# Altium PCB DevBoard.PcbDoc (part 2 of 2)
Units mil, origin at the board's own origin, x right, y up, seen from the top; angles counter-clockwise.
Board outline 3635 x 2820 mil, 4 copper layers (Top Layer, Layer 1, Layer 2, Bottom Layer), stack 22.334 mil thick; 84 components, 151 nets, 484 pads, 93 vias.
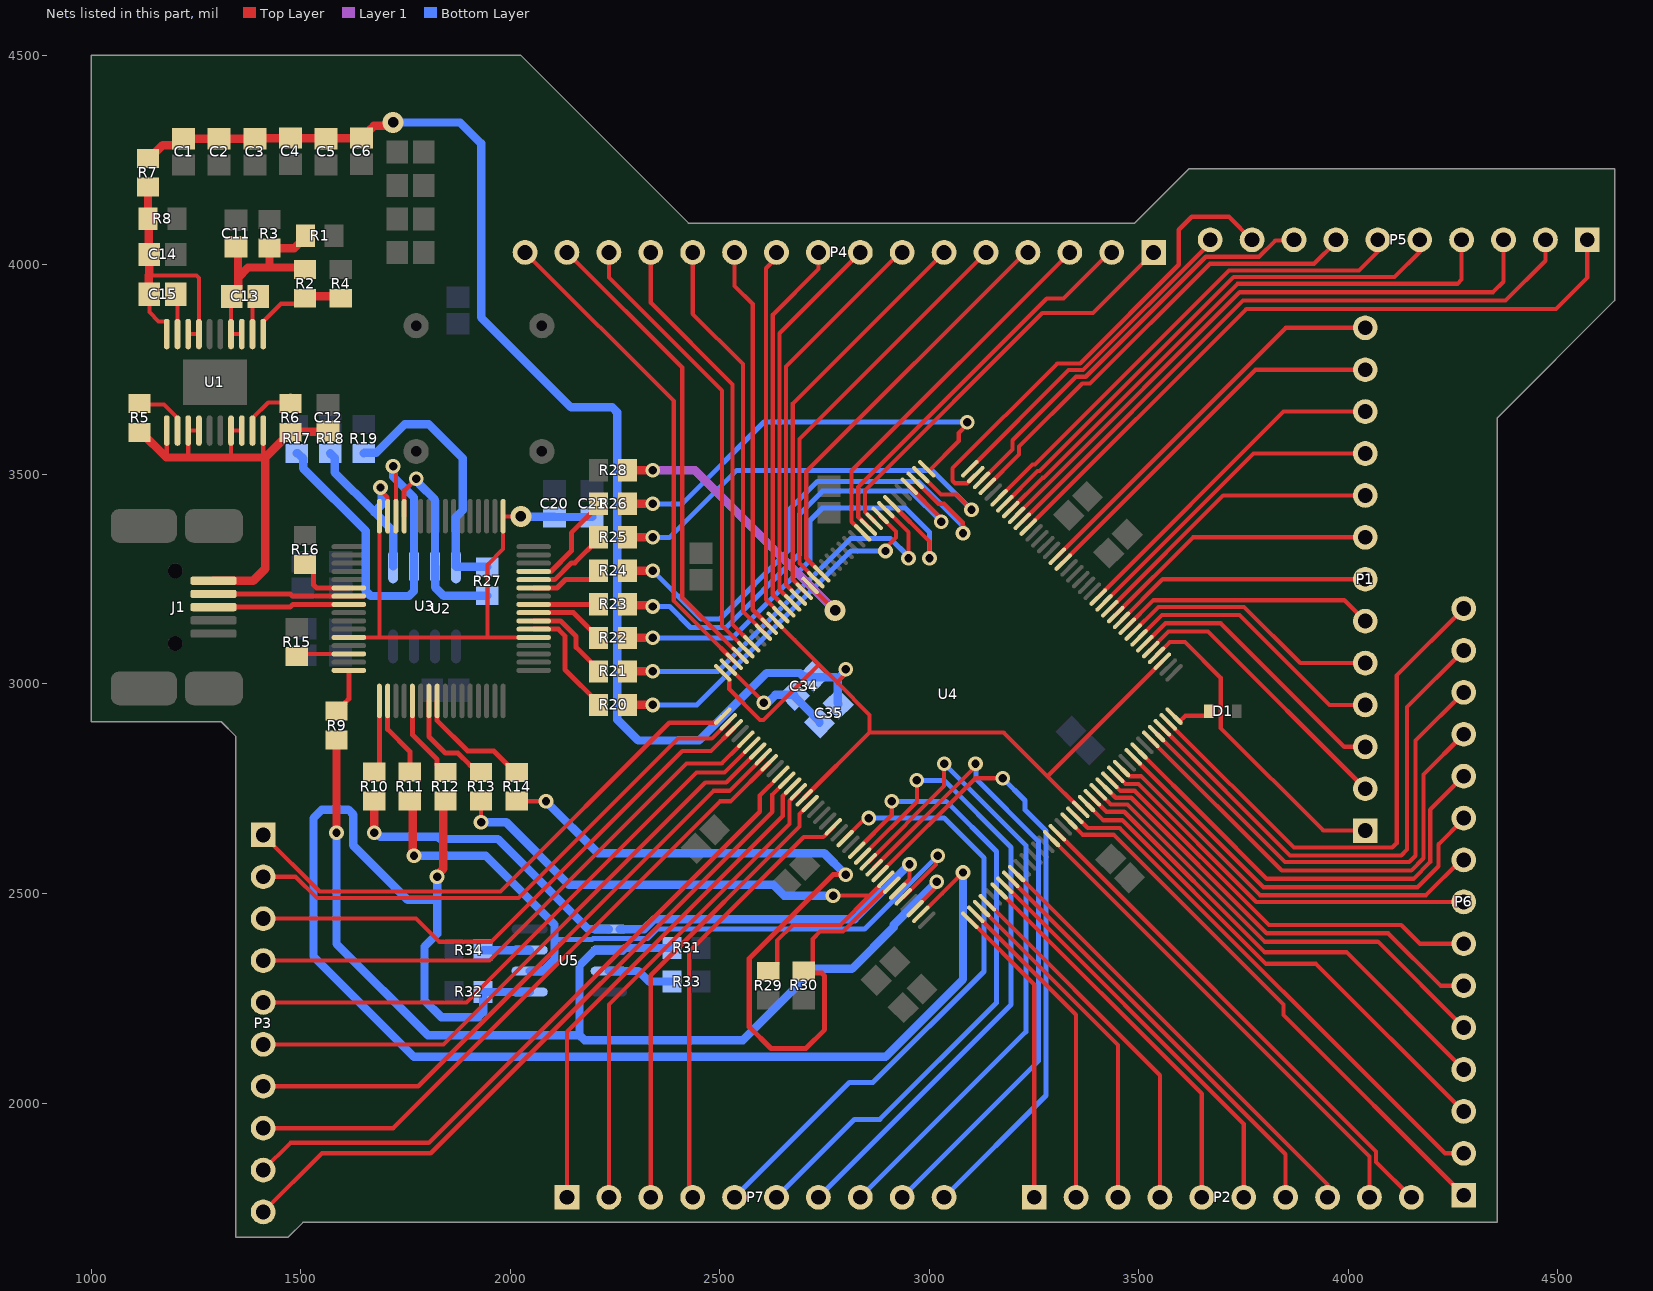
[diagram p4: the nets of this part, all layers, seen from the top]

## Via types
v1: diameter 35, hole 20, Top Layer to Bottom Layer, 71 vias
v2: diameter 50, hole 25, Top Layer to Bottom Layer, 11 vias
v3: diameter 19.68, hole 7.87, Top Layer to Bottom Layer, 6 vias
v4: diameter 50, hole 28, Top Layer to Bottom Layer, 4 vias
v5: diameter 35, hole 25, Top Layer to Bottom Layer, 1 vias

## Nets (pads, with @x,y where several pads share a name; then routed paths per layer and width w, separated by ;. In a path a pad name is that pad's centre, name@x,y a point inside that pad or via, vN(x,y) a via of type N, cw(c..) or ccw(c..) an arc to the next point about the centre after c; other vN are vias at no path point) (continued)
NetC1_2: C1.2 C2.2 C3.2 C4.2 C5.2 C6.1 C34.2 C35.2 R7.2 U4.27 U4.36 U4.51 U4.92 U4.111 | length 5060
  Top Layer w10: U4.36@2506.32,3026.5 2522.21,3010.61 2522.21,2987.79 2595.86,2914.14 2604.14,2914.14 2736.68,3046.68 ; U4.27@2631.59,3151.78 2679.18,3104.18 2736.68,3046.68 ; U4.51@2701.19,2728.63 2857.14,2884.58 ; v1(2800,3035) 2800,3024.18 2780.24,3004.41 2780.24,3003.13 ; U4.92@3360.97,2700.79 3280.88,2780.88 ; U4.111@3555.84,3054.34 3282.38,2780.88 3280.88,2780.88 ; 2736.68,3046.68 2780.24,3003.13 ; 2780.24,3003.13 2857.14,2926.23 2857.14,2884.58 ; 2857.14,2884.58 3177.18,2884.58 3280.88,2780.88
  Top Layer w20: R7.2@1135,4254.45 1138.94,4254.45 1170.39,4285.91 1204.41,4285.91 C1.2@1220,4301.5 C2.2@1305,4301.5 C3.2@1390,4301.5 1390.75,4302.24 1474.25,4302.24 C4.2@1475,4302.99 1475.75,4302.24 1559.25,4302.24 C5.2@1560,4301.5 1560.75,4302.24 1644.25,4302.24 C6.1@1645,4302.99 1646.97,4302.99 1662.56,4318.58 1662.56,4320.19 1674.27,4331.91 1703.79,4331.91 1711.88,4340 v2(1720,4340)
  Bottom Layer w20: v2(1720,4340) 1880,4340 1930,4290 1930,3875 2145,3660 2243.28,3660 2255,3648.28 2255,2915 2305,2865 2450,2865 2611.31,3026.31 2691.18,3026.31 2700.22,3017.27 C34.2@2722.27,3017.27 2723.66,3015.88 2776.82,3015.88 ; C35.2@2782.27,2952.27 2780.88,2953.66 2780.88,3011.82 2800,3030.94 v1(2800,3035)
NetC11_2: C11.2 C13.1 R1.1 R2.2 R3.2 U1.3 U1.4 | length 550.3
  Top Layer w10: C13.1@1333.39,3923.39 U1.4@1333.39,3835.16 U1.3@1358.98,3835.16
  Top Layer w20: C13.1@1333.39,3923.39 1350.59,3940.59 1350.59,3970.59 ; C11.2@1350,4057.01 1350,3971.18 1350.59,3970.59 ; R2.2@1490,3993.9 1425,3993.9 ; R1.1@1510.55,4070 1510.55,4066.06 1484.49,4040 R3.2@1425,4040 1425,3993.9 ; 1350.59,3970.59 1373.9,3993.9 1425,3993.9
NetC12_2: C12.2 J1.1 R5.2 R6.2 U1.11 U1.13 U1.14 U1.17 U1.18 U1.20 | length 1215.9
  Top Layer w10: 1178.94,3540.55 1179.84,3541.46 U1.11@1179.84,3604.84 ; 1230,3540.55 1231.02,3541.57 U1.13@1231.02,3604.84 U1.14@1256.61,3604.84 ; 1335,3540.55 1333.39,3542.17 U1.17@1333.39,3604.84 U1.18@1358.98,3604.84 ; U1.20@1410.16,3604.84 1410.16,3545.39 1415,3540.55
  Top Layer w20: R5.2@1115,3600.55 1118.94,3600.55 1178.94,3540.55 1230,3540.55 1335,3540.55 1415,3540.55 ; J1.1@1291.53,3246.38 1386.38,3246.38 1415,3275 1415,3540.55 ; C12.2@1565,3603.5 1563.52,3602.03 1476.48,3602.03 R6.2@1475,3600.55 1471.06,3600.55 1458.43,3587.91 1458.43,3583.98 1415,3540.55
NetC13_2: C13.2 U1.2 | length 95.4
  Top Layer w10: U1.2@1384.57,3835.16 1384.57,3911.57 C13.2@1397.99,3925
NetC14_2: C14.2 C15.1 R7.1 R8.2 U1.7 U1.8 U1.10 | length 668.2
  Top Layer w10: 1136.75,3975 1250.76,3975 1256.61,3969.14 U1.7@1256.61,3835.16 U1.8@1231.02,3835.16 ; C15.1@1138.5,3930 1138.5,3887.44 1160.54,3865.41 1178.1,3865.41 1179.84,3863.66 U1.10@1179.84,3835.16 U1.10@1180.57,3835.88
  Top Layer w20: C14.2@1136,4022.5 1136.75,4023.25 1136.75,4108.25 R8.2@1135,4110 R7.1@1135,4185.55 R7.1@1136.75,4187.3 ; C15.1@1138.5,3930 1136.75,3931.75 1136.75,3975 1138.5,3976.75 C14.2@1138.5,4025
NetC15_2: C15.2 U1.9 | length 85.4
  Top Layer w10: U1.9@1205.43,3835.16 C15.2@1205.43,3920.59
NetC20_2: C20.2 C21.2 U2.12 U2.37 U2.49 U2.64 | length 1249
  Top Layer w10: U2.12@1614.53,3111.1 1688.7,3111.1 ; U2.64@1687.36,3400.47 1687.36,3112.44 1688.7,3111.1 ; v2(2025,3400) 1983.11,3400 U2.49@1982.64,3400.47 1982.64,3322.01 1945,3284.37 1945,3111.1 ; U2.37@2055.47,3111.1 1963.9,3111.1 1960,3111.1 1945,3111.1 ; 1688.7,3111.1 1945,3111.1
  Bottom Layer w20: v2(2025,3400) 2025.75,3399.25 2104.25,3399.25 C20.2@2105,3398.5 C21.2@2195,3398.5
NetC34_1: C34.1 C35.1 U4.35 | length 291.5
  Top Layer w10: U4.35@2520.24,3040.42 2520.24,3040.31 2604.85,2955.7 v1(2604.85,2955.15)
  Bottom Layer w20: v1(2604.85,2955.15) 2613.27,2955.15 2632.24,2974.12 2676.34,2974.12 C34.1@2677.73,2972.73 2677.73,2970.23 2737.73,2910.23 C35.1@2737.73,2907.73
NetD1_1: D1.1 U4.108 | length 101
  Top Layer w10: U4.108@3583.68,2923.5 3597.07,2910.11 3597.18,2910.11 3611.32,2924.25 3659.72,2924.25 3666.54,2931.06 D1.1@3666.54,2935
NetD2_1: P2.1 U4.73 | length 724.9
  Top Layer w10: U4.73@3096.5,2436.32 3250,2282.82 P2.1@3250,1775
NetD2_2: 
NetD3_2: 
NetD4_2: 
NetD5_2: 
NetD6_2: 
NetD7_2: 
NetD8_2: 
NetD9_2: 
NetD10_2: 
NetD11_2: 
NetD12_2: 
NetD13_2: 
NetD14_2: 
NetD15_2: 
NetD16_2: 
NetD17_1: P2.2 U4.74 | length 774.5
  Top Layer w10: U4.74@3110.42,2450.24 3350,2210.66 P2.2@3350,1775
NetD32_1: P2.3 U4.75 | length 824
  Top Layer w10: U4.75@3124.34,2464.16 3450,2138.5 P2.3@3450,1775
NetD47_1: P2.4 U4.76 | length 873.6
  Top Layer w10: U4.76@3138.26,2478.08 3550,2066.34 P2.4@3550,1775
NetD62_1: P2.5 U4.78 | length 931.4
  Top Layer w10: U4.78@3166.1,2505.92 3650,2022.01 P2.5@3650,1775
NetD77_1: P2.6 U4.79 | length 980.9
  Top Layer w10: U4.79@3180.02,2519.83 3750,1949.85 P2.6@3750,1775
NetD92_1: P2.7 U4.80 | length 1030.5
  Top Layer w10: U4.80@3193.94,2533.75 3850,1877.69 P2.7@3850,1775
NetD107_1: P2.8 U4.81 | length 1080.1
  Top Layer w10: U4.81@3207.86,2547.67 3950,1805.53 P2.8@3950,1775
NetD122_1: P2.9 U4.87 | length 1170.4
  Top Layer w10: U4.87@3291.37,2631.19 4050,1872.56 P2.9@4050,1775
NetD137_1: P2.10 U4.88 | length 1220
  Top Layer w10: U4.88@3305.29,2645.11 4066,1884.4 4066,1859 P2.10@4150,1775
NetJ1_2: J1.2 U2.7 | length 360.2
  Top Layer w12: J1.2@1291.53,3214.88 1474.79,3214.88 1480.15,3209.53 U2.7@1649.53,3209.53
NetJ1_3: J1.3 U2.8 | length 360.7
  Top Layer w12: J1.3@1291.53,3183.39 1474.24,3183.39 1480.7,3189.84 U2.8@1649.53,3189.84
NetP1_1: P1.1 U4.112 | length 767.9
  Top Layer w10: U4.112@3541.92,3068.26 3573.66,3100 3610,3100 3695,3015 3695,2895 3940,2650 P1.1@4040,2650
NetP1_2: P1.2 U4.113 | length 685.1
  Top Layer w10: U4.113@3528,3082.18 3570.82,3125 3665,3125 P1.2@4040,2750
NetP1_3: P1.3 U4.114 | length 668.4
  Top Layer w10: U4.114@3514.08,3096.1 3562.99,3145 3695,3145 3990,2850 P1.3@4040,2850
NetP1_4: P1.4 U4.115 | length 651.7
  Top Layer w10: U4.115@3500.17,3110.02 3555.15,3165 3740,3165 3955,2950 P1.4@4040,2950
NetP1_5: P1.5 U4.116 | length 634.1
  Top Layer w10: U4.116@3486.25,3123.94 3546.31,3184 3751,3184 3885,3050 P1.5@4040,3050
NetP1_6: P1.6 U4.117 | length 614.1
  Top Layer w10: U4.117@3472.33,3137.86 3534.47,3200 3990,3200 P1.6@4040,3150
NetP1_7: P1.7 U4.118 | length 622.3
  Top Layer w10: U4.118@3458.41,3151.78 3556.63,3250 P1.7@4040,3250
NetP1_8: P1.8 U4.119 | length 671.9
  Top Layer w10: U4.119@3444.49,3165.7 3628.79,3350 P1.8@4040,3350
NetP1_9: P1.9 U4.120 | length 721.4
  Top Layer w10: U4.120@3430.57,3179.62 3700.95,3450 P1.9@4040,3450
NetP1_10: P1.10 U4.121 | length 771
  Top Layer w10: U4.121@3416.65,3193.53 3773.11,3550 P1.10@4040,3550
NetP1_11: P1.11 U4.122 | length 820.6
  Top Layer w10: U4.122@3402.73,3207.45 3845.27,3650 P1.11@4040,3650
NetP1_12: P1.12 U4.128 | length 910.9
  Top Layer w10: U4.128@3319.21,3290.97 3778.24,3750 P1.12@4040,3750
NetP1_13: P1.13 U4.129 | length 960.5
  Top Layer w10: U4.129@3305.29,3304.89 3850.4,3850 P1.13@4040,3850
NetP3_1: P3.1 U4.37 | length 1325.6
  Top Layer w10: P3.1@1410,2640 1545,2505 1976.35,2505 2378.96,2907.6 2490.42,2907.6 U4.37@2506.32,2923.5
NetP3_2: P3.2 U4.38 | length 1305.6
  Top Layer w10: P3.2@1410,2540 1487.37,2540 1538.37,2489 2019,2489 2400,2870 2480.66,2870 U4.38@2520.24,2909.58
NetP3_3: P3.3 U4.39 | length 1358.5
  Top Layer w10: P3.3@1410,2440 1775,2440 1830,2385 1955,2385 2410,2840 2478.5,2840 U4.39@2534.16,2895.66
NetP3_4: P3.4 U4.41 | length 1348.1
  Top Layer w10: P3.4@1410,2340 1950,2340 2420,2810 2504.18,2810 U4.41@2546.04,2851.87
NetP3_5: P3.5 U4.42 | length 1397.6
  Top Layer w10: P3.5@1410,2240 1895,2240 2444,2789 2510.9,2789 U4.42@2559.91,2838.01
NetP3_6: P3.6 U4.43 | length 1453.9
  Top Layer w10: P3.6@1410,2140 1840,2140 2465,2765 2515,2765 U4.43@2578.62,2828.62
NetP3_7: P3.7 U4.44 | length 1519.4
  Top Layer w10: P3.7@1410,2040 1780,2040 2485,2745 2522.69,2745 U4.44@2603.75,2826.06
NetP3_8: P3.8 U4.45 | length 1568.9
  Top Layer w10: P3.8@1410,1940 1720.47,1940 2500.47,2720 2525.53,2720 U4.45@2617.67,2812.14
NetP3_9: P3.9 U4.47 | length 1649.4
  Top Layer w10: P3.9@1410,1840 1475,1905 1805,1905 2595,2695 2595,2733.79 U4.47@2645.51,2784.3
NetP3_10: P3.10 U4.48 | length 1700.2
  Top Layer w10: P3.10@1410,1740 1550,1880 1810,1880 2625,2695 2625,2735.95 U4.48@2659.43,2770.38
NetP4_1: P4.1 U4.10 | length 1007
  Top Layer w10: U4.10@2868.22,3388.41 2868.22,3388.52 2846,3410.74 2846,3461.91 3269.09,3885 3390,3885 P4.1@3535,4030
NetP4_2: P4.2 U4.11 | length 942.5
  Top Layer w10: U4.11@2854.3,3374.49 2830,3398.79 2830,3470 3280,3920 3320,3920 3430,4030 P4.2@3435,4030
NetP4_3: P4.3 U4.12 | length 896.2
  Top Layer w10: U4.12@2840.38,3360.57 2840.38,3360.68 2814,3387.06 2814,3509 P4.3@3335,4030
NetP4_4: P4.4 U4.19 | length 1004.8
  Top Layer w10: U4.19@2742.95,3263.13 2706,3300.08 2706,3506.91 3229.09,4030 P4.4@3235,4030
NetP4_5: P4.5 U4.20 | length 981.3
  Top Layer w10: U4.20@2729.03,3249.21 2729.03,3249.32 2690,3288.35 2690,3585 P4.5@3135,4030
NetP4_6: P4.6 U4.22 | length 969.4
  Top Layer w10: U4.22@2701.19,3221.37 2701.19,3221.49 2674,3248.68 2674,3669 P4.6@3035,4030
NetP4_7: P4.7 U4.23 | length 929.7
  Top Layer w10: U4.23@2671.37,3223.46 2658,3236.84 2658,3758 2930,4030 P4.7@2935,4030
NetP4_8: P4.8 U4.24 | length 929.4
  Top Layer w10: U4.24@2673.35,3193.53 2642,3224.89 2642,3837 P4.8@2835,4030
NetP4_9: P4.9 U4.25 | length 909.4
  Top Layer w10: U4.25@2659.43,3179.62 2626,3213.05 2626,3881 2735,3990 P4.9@2735,4030
NetP4_10: P4.10 U4.26 | length 889.4
  Top Layer w10: P4.10@2635,4030 2635,4017.03 2610,3992.03 2610,3201.21 U4.26@2645.51,3165.7
NetP4_11: P4.11 U4.28 | length 926.4
  Top Layer w10: P4.11@2535,4030 2535,3950 2578.39,3906.61 2578.39,3177.14 U4.28@2617.67,3137.86
NetP4_12: P4.12 U4.29 | length 976
  Top Layer w10: P4.12@2435,4030 2435,3883.36 2555,3763.36 2555,3172.69 U4.29@2603.75,3123.94
NetP4_13: P4.13 U4.31 | length 1033.7
  Top Layer w10: P4.13@2335,4030 2335,3910 2530,3715 2530,3142.01 U4.31@2575.92,3096.1
NetP4_14: P4.14 U4.32 | length 1083.3
  Top Layer w10: P4.14@2235,4030 2235,3970 2505,3700 2505,3139.18 U4.32@2562,3082.18
NetP4_15: P4.15 U4.33 | length 1133
  Top Layer w10: P4.15@2135,4030 2410,3755 2410,3206.03 2479.38,3136.65 2479.69,3136.65 U4.33@2548.08,3068.26
NetP4_16: P4.16 U4.34 | length 1182.4
  Top Layer w10: P4.16@2035,4030 2390,3675 2390,3198.5 2467.85,3120.65 U4.34@2534.16,3054.34
NetP5_1: P5.1 U4.134 | length 1666
  Top Layer w10: U4.134@3235.7,3374.49 3756.21,3895 4495,3895 4570,3970 P5.1@4570,4055
NetP5_2: P5.2 U4.135 | length 1550.7
  Top Layer w10: U4.135@3221.78,3388.41 3748.37,3915 4375,3915 4470,4010 P5.2@4470,4055
NetP5_3: P5.3 U4.136 | length 1488.1
  Top Layer w10: U4.136@3207.86,3402.33 3281.53,3476 3740.53,3935 4345,3935 4370,3960 P5.3@4370,4055
NetP5_4: P5.4 U4.137 | length 1373.4
  Top Layer w10: U4.137@3193.94,3416.25 3269.69,3492 3272,3492 3735,3955 4260,3955 4270,3965 P5.4@4270,4035
NetP5_5: P5.5 U4.138 | length 1242.9
  Top Layer w10: U4.138@3180.02,3430.17 3257.85,3508 3263,3508 3726,3971 4110,3971 4170,4031 P5.5@4170,4035
NetP5_6: P5.6 U4.139 | length 1150.4
  Top Layer w10: U4.139@3166.1,3444.08 3246.01,3524 3252.19,3524 3715.19,3987 4025,3987 4070,4032 P5.6@4070,4035
NetP5_7: P5.7 U4.141 | length 1084.2
  Top Layer w10: U4.141@3138.26,3471.92 3214,3547.66 3214,3566.42 3364.76,3717.18 3383.52,3717.18 3669.34,4003 3918,4003 P5.7@3970,4055
NetP5_8: P5.8 U4.142 | length 996.4
  Top Layer w10: U4.142@3124.34,3485.84 3198,3559.5 3198,3581.54 3349.64,3733.18 3373.05,3733.18 3659.34,4019.47 3786.79,4019.47 3825.47,4058.16 3868.16,4058.16 P5.8@3870,4060
NetP5_9: P5.9 U4.143 | length 1131.8
  Top Layer w10: U4.143@3110.42,3499.76 3110.31,3499.76 3089.69,3479.14 3060.86,3479.14 3055,3485 3055,3515 3305.18,3765.18 3359.79,3765.18 3594.97,4000.36 3594.97,4084.11 3625.86,4115 3715,4115 P5.9@3770,4060
NetP5_10: P5.10 U4.144 | length 804
  Top Layer w10: U4.144@3096.5,3513.68 3332,3749.18 3366.42,3749.18 3670,4052.76 P5.10@3670,4060
NetP6_1: P6.1 U4.90 | length 1326.4
  Top Layer w10: U4.90@3333.13,2672.95 3366.08,2640 3440,2640 3845.24,2234.76 3845.24,2209.76 P6.1@4275,1780
NetP6_2: P6.2 U4.91 | length 1262.2
  Top Layer w10: U4.91@3347.05,2686.87 3377.92,2656 3454,2656 4230,1880 P6.2@4275,1880
NetP6_3: P6.3 U4.93 | length 1204.4
  Top Layer w10: U4.93@3374.89,2714.71 3414.6,2675 3460,2675 3802.81,2332.19 3922.81,2332.19 P6.3@4275,1980
NetP6_4: P6.4 U4.94 | length 1154.9
  Top Layer w10: U4.94@3388.81,2728.63 3422.44,2695 3465,2695 3800,2360 3995,2360 P6.4@4275,2080
NetP6_5: P6.5 U4.95 | length 1105.3
  Top Layer w10: U4.95@3402.73,2742.55 3402.84,2742.55 3432.88,2712.51 3472.49,2712.51 3800,2385 4070,2385 P6.5@4275,2180
NetP6_6: P6.6 U4.96 | length 1055.7
  Top Layer w10: U4.96@3416.65,2756.47 3416.76,2756.47 3444.72,2728.51 3481.49,2728.51 3805,2405 4095,2405 4220,2280 P6.6@4275,2280
NetP6_7: P6.7 U4.97 | length 1006.1
  Top Layer w10: U4.97@3430.57,2770.38 3430.68,2770.38 3456.06,2745 3490,2745 3810,2425 4125.86,2425 4170.86,2380 P6.7@4275,2380
NetP6_8: P6.8 U4.98 | length 956.6
  Top Layer w10: U4.98@3444.49,2784.3 3444.6,2784.3 3467.9,2761 3499,2761 3780,2480 P6.8@4275,2480
NetP6_9: P6.9 U4.99 | length 976.6
  Top Layer w10: U4.99@3458.41,2798.22 3476.63,2780 3505,2780 3789,2496 4185,2496 4269,2580 P6.9@4275,2580
NetP6_10: P6.10 U4.101 | length 1018.2
  Top Layer w10: U4.101@3486.25,2826.06 3797.31,2515 4165,2515 4215,2565 4215,2617.37 4275,2677.37 P6.10@4275,2680
NetP6_11: P6.11 U4.102 | length 1076
  Top Layer w10: U4.102@3500.17,2839.98 3660.53,2679.62 3660.53,2679.47 3805,2535 4155,2535 4195,2575 4195,2700 P6.11@4275,2780
NetP6_12: P6.12 U4.104 | length 1128.3
  Top Layer w10: U4.104@3528,2867.82 3840.82,2555 4150,2555 4179,2584 4179,2784 P6.12@4275,2880
NetP6_13: P6.13 U4.105 | length 1189
  Top Layer w10: U4.105@3541.92,2881.74 3848.66,2575 4145,2575 4160,2590 4160,2865 P6.13@4275,2980
NetP6_14: P6.14 U4.106 | length 1247.1
  Top Layer w10: U4.106@3555.84,2895.66 3860.5,2591 4126,2591 4140,2605 4140,2945 P6.14@4275,3080
NetP6_15: P6.15 U4.107 | length 1300.2
  Top Layer w10: U4.107@3569.76,2909.58 3869.87,2609.47 4104.47,2609.47 4115,2620 4115,3020 P6.15@4275,3180
NetP7_1: P7.1 U4.49 | length 1204.5
  Top Layer w10: P7.1@2135,1775 2135,2170 2650,2685 2650,2733 2673.35,2756.35 U4.49@2673.35,2756.47
NetP7_2: P7.2 U4.50 | length 1154.9
  Top Layer w10: P7.2@2235,1775 2235,2235 2666,2666 2666,2721.16 2687.27,2742.43 U4.50@2687.27,2742.55
NetP7_3: P7.3 U4.52 | length 1097.2
  Top Layer w10: P7.3@2335,1775 2335,2305 2690,2660 2690,2689.49 2715.11,2714.6 U4.52@2715.11,2714.71
NetP7_4: P7.4 U4.56 | length 1057.3
  Top Layer w10: P7.4@2435,1775 2426.82,1783.18 2426.82,2361.82 2700,2635 2746.76,2635 U4.56@2770.79,2659.03
NetP7_5: P7.5 U4.58 | length 1480.3
  Top Layer w10: U4.58@2798.63,2631.19 2842.65,2675.22 2850.22,2675.22 v1(2855,2680)
  Bottom Layer w12: P7.5@2535,1775 2808.95,2048.95 2865.06,2048.95 3130,2313.89 3130,2585 3035,2680 v1(2855,2680)
NetP7_6: P7.6 U4.60 | length 1529
  Top Layer w10: U4.60@2826.47,2603.35 2910,2686.89 v1(2910,2720)
  Bottom Layer w12: P7.6@2635,1775 2820.98,1960.98 2881.74,1960.98 3160,2239.24 3160,2600 3040,2720 v1(2910,2720)
NetP7_7: P7.7 U4.61 | length 1551.1
  Top Layer w10: U4.61@2840.38,2589.43 2970,2719.05 v1(2970,2770)
  Bottom Layer w12: P7.7@2735,1775 3195,2235 3195,2610 3035,2770 v1(2970,2770)
NetP7_8: P7.8 U4.62 | length 1588.7
  Top Layer w10: U4.62@2854.3,2575.51 3035,2756.21 v1(3035,2810)
  Bottom Layer w12: P7.8@2835,1775 3230,2170 3230,2615 v1(3035,2810)
NetP7_9: P7.9 U4.63 | length 1580.3
  Top Layer w10: U4.63@2868.22,2561.59 2868.22,2561.7 3110,2803.48 v1(3110,2810)
  Bottom Layer w12: P7.9@2935,1775 3260,2100 3260,2625 3110.91,2774.09 3110.91,2809.09 v1(3110,2810)
NetP7_10: P7.10 U4.64 | length 1530.3
  Top Layer w10: U4.64@2882.14,2547.67 3109.47,2775 v1(3175,2775)
  Bottom Layer w12: P7.10@3035,1775 3278,2018 3278,2649.67 3228,2699.67 3228,2722 v1(3175,2775)
NetR2_1: R2.1 R4.1 U1.1 | length 241.2
  Top Layer w10: U1.1@1410.16,3835.16 1410.16,3864.68 1452.83,3907.36 1496.81,3907.36 R2.1@1510,3920.55
  Top Layer w20: R2.1@1510,3920.55 1514.45,3925 1590.55,3925 R4.1@1595,3920.55
NetR5_1: R5.1 U1.12 | length 140.7
  Top Layer w10: R5.1@1115,3684.45 1132.64,3666.81 1172.99,3666.81 1205.43,3634.37 U1.12@1205.43,3604.84
NetR6_1: R6.1 U1.19 | length 142.8
  Top Layer w10: U1.19@1384.57,3604.84 1384.57,3634.37 1422.01,3671.81 1457.36,3671.81 R6.1@1475,3689.45
NetR9_1: R9.1 R31.1 U4.70 U5.6 | length 2663.9
  Top Layer w10: U4.70@2965.66,2464.16 2965.66,2464.27 3019.05,2517.66 3019.05,2525.95 v1(3017.35,2527.65)
  Top Layer w20: v1(1585,2645) R9.1@1585,2866.1
  Bottom Layer w20: v1(1585,2645) 1585,2380 1803.28,2161.72 2165,2161.72 ; R31.1@2385.87,2370 2272.73,2370 2267.73,2365 U5.6@2234.8,2365 2202.32,2365 2165,2327.68 2165,2161.72 ; v1(3017.35,2527.65) 2914.74,2425.04 2914.74,2419.74 2815,2320 2725,2320 2555,2150 2176.72,2150 2165,2161.72
NetR9_2: R9.2 U2.16 | length 111.9
  Top Layer w12: R9.2@1585,2935 1588.94,2935 1605.57,2951.64 1605.57,2955.57 1614.53,2964.53 U2.16@1614.53,3032.36
NetR10_1: R10.1 U4.67 U5.5 | length 1562.6
  Top Layer w10: U4.67@2923.9,2505.92 2952.5,2534.51 v1(2952.5,2570)
  Top Layer w20: v1(1675,2645) R10.1@1675,2720.87
  Bottom Layer w20: v1(1675,2645) 1679.06,2645 1689.06,2635 1827.03,2635 1832.03,2630 1970,2630 2184.68,2415.32 2234.49,2415.32 U5.5@2234.8,2415 ; U5.5@2260.97,2415 2319.36,2415 2343.36,2439 2821.5,2439 v1(2952.5,2570)
NetR10_2: R10.2 U2.17 | length 174.9
  Top Layer w12: R10.2@1675,2789.76 1687.36,2802.13 U2.17@1687.36,2959.53
NetR11_1: R11.1 U4.68 U5.2 | length 1822.2
  Top Layer w10: U4.68@2937.82,2492 3015.22,2569.39 3015.22,2585.22 v1(3020,2590)
  Top Layer w20: R11.1@1760,2720.87 1767.13,2713.74 1767.13,2592.87 v1(1770,2590)
  Bottom Layer w12: 2105.13,2390 2195.04,2390 2197.21,2392.17 2327.64,2392.17 2350.47,2415 2845,2415 v1(3020,2590)
  Bottom Layer w20: v1(1770,2590) 1941.25,2590 2105.13,2426.11 2105.13,2390 2105.13,2342.27 2077.86,2315 U5.2@2045.83,2315
NetR11_2: R11.2 U2.18 | length 191.7
  Top Layer w12: U2.18@1707.05,2959.53 1707.05,2891.82 1760,2838.87 R11.2@1760,2789.76
NetR12_1: R12.1 R32.2 U4.71 U5.1 | length 3704.6
  Top Layer w10: U4.71@2979.58,2450.24 3028.49,2499.15 3029.15,2499.15 v1(3080,2550)
  Top Layer w20: v1(1825,2540) 1825,2544.06 1840,2559.06 1840,2715.31 R12.1@1845,2720.31
  Bottom Layer w20: v1(1825,2540) 1825,2485 ; U5.1@2045.83,2265 R32.2@1934.76,2265 1934.76,2216.72 1923.05,2205 1835,2205 1795,2245 1795,2373.44 1825,2403.44 1825,2485 ; v1(3080,2550) 3080,2295 2895,2110 1770,2110 1530,2350 1530,2680 1550,2700 1613.28,2700 1625,2688.28 1625,2615 1755,2485 1825,2485
NetR12_2: R12.2 U2.21 | length 204.9
  Top Layer w12: U2.21@1766.1,2959.53 1766.2,2959.43 1766.2,2878.8 1825.06,2819.94 1825.06,2805.85 1841.7,2789.21 R12.2@1845,2789.21
NetR13_1: R13.1 R29.1 U4.65 | length 1462.8
  Top Layer w10: v1(1930,2670) 1930,2700.31 1940,2710.31 R13.1@1930,2720.31 ; R29.1@2615,2314.45 2618.94,2314.45 2636.57,2332.09 2636.57,2387.53 2674.01,2424.97 2787.28,2424.97 2857.31,2495 ; v1(2770,2495) 2857.31,2495 ; U4.65@2896.06,2533.75 2857.31,2495
  Bottom Layer w20: v1(1930,2670) 1990,2670 2139,2521 2626.98,2521 2652.98,2495 v1(2770,2495)
NetR13_2: R13.2 U2.23 | length 244.9
  Top Layer w12: U2.23@1805.47,2959.53 1805.47,2874.53 1845,2835 1875,2835 1904.15,2805.85 1913.36,2805.85 R13.2@1930,2789.21
NetR14_1: R14.1 R30.1 U4.66 | length 2043.3
  Top Layer w10: R14.1@2015,2720.31 2015.31,2720 v1(2085,2720) ; R30.1@2700,2315 2703.94,2315 2721.57,2332.64 2721.57,2391.57 2738.97,2408.97 2793.91,2408.97 2888.87,2503.94 U4.66@2893.97,2503.94
  Top Layer w12: R30.1@2700,2315 2705,2310 2742.97,2310 2750,2302.97 2750,2175 2705,2130 2622.03,2130 2570,2182.03 2570,2345 2770,2545 v1(2800,2545)
  Bottom Layer w20: v1(2085,2720) 2209,2596 2749,2596 v1(2800,2545)
NetR14_2: R14.2 U2.24 | length 287.8
  Top Layer w12: U2.24@1825.16,2959.53 1825.25,2959.43 1825.25,2912.59 1897.84,2840 1960.28,2840 2011.06,2789.21 R14.2@2015,2789.21
NetR15_2: R15.2 U2.14 | length 125.5
  Top Layer w10: R15.2@1492.28,3071.73 U2.14@1614.53,3071.73 ; R15.2@1495,3059.45 R15.2@1497.28,3061.73
NetR16_2: R16.2 U2.6 | length 146.9
  Top Layer w12: R16.2@1510,3285.55 1513.94,3285.55 1530.57,3268.91 1530.57,3236.34 1537.6,3229.31 1614.43,3229.31 U2.6@1614.53,3229.21
NetR17_1: R17.1 U2.62 U3.2 | length 964.9
  Top Layer w10: v1(1720,3520) 1720,3513.24 1726.73,3506.5 U2.62@1726.73,3400.47
  Bottom Layer w20: R17.1@1490,3550.55 1492.91,3550.55 1505.54,3537.91 1505.54,3514.46 1655,3365 1655,3221.72 1666.72,3210 1758.28,3210 1770,3221.72 U3.2@1770,3280.47 1770,3445 1720,3495 v1(1720,3520)
NetR18_1: R18.1 U2.63 U3.1 | length 480.9
  Top Layer w10: v1(1690.05,3469.04) 1690.05,3462.27 1706.7,3445.62 1706.7,3400.82 U2.63@1707.05,3400.47
  Bottom Layer w20: R18.1@1570,3550.55 1580.55,3540 1580.55,3505 1675.28,3410.28 ; v1@1690,3475 1690.05,3474.95 v1(1690.05,3469.04) 1690.05,3468.07 1692.77,3465.35 1692.77,3427.77 1675.28,3410.28 ; U3.1@1720,3280.47 1720,3365.55 1675.28,3410.28
NetR19_1: R19.1 R27.1 U3.4 | length 638.6
  Bottom Layer w20: R19.1@1650,3550.55 1651.67,3552.22 1680,3552.22 1747.43,3619.64 1805.36,3619.64 1886,3539 1886,3414.34 1870,3398.34 U3.4@1870,3280.47 1870.51,3279.96 1944.49,3279.96 R27.1@1945,3279.45
NetR20_1: R20.1 U4.9 | length 878.9
  Top Layer w10: U4.9@2882.14,3402.33 2920.22,3364.25 2920.22,3349.78 2895,3324.57 v1(2895,3317.28)
  Top Layer w20: R20.1@2279.45,2950 v1(2340,2950)
  Bottom Layer w12: v1(2340,2950) 2445,2950 2812.28,3317.28 v1(2895,3317.28)
NetR20_2: R20.2 U2.38 | length 279.4
  Top Layer w12: U2.38@2055.47,3130.79 2114.21,3130.79 2130,3115 2130,3034.49 2210.55,2953.94 R20.2@2210.55,2950
NetR21_1: R21.1 U4.8 | length 962.1
  Top Layer w10: U4.8@2896.06,3416.25 2950,3362.31 v1(2950,3300)
  Top Layer w20: R21.1@2279.45,3030 v1(2340,3030)
  Bottom Layer w12: v1(2340,3030) 2495,3030 2811.78,3346.78 2907.22,3346.78 2950,3304 v1(2950,3300)
NetR21_2: R21.2 U2.39 | length 222.5
  Top Layer w12: U2.39@2055.47,3150.47 2119.98,3150.47 2157,3113.46 2157,3087.49 2210.55,3033.94 R21.2@2210.55,3030
NetR22_1: R22.1 U4.7 | length 1158.2
  Top Layer w10: U4.7@2909.98,3430.17 3000,3340.15 v1(3000,3300)
  Top Layer w20: R22.1@2279.45,3110 v1(2340,3110)
  Bottom Layer w12: v1(2340,3110) 2530,3110 2715,3295 2715,3390 2745,3420 2942.25,3420 3000,3362.25 v1(3000,3300)
NetR22_2: R22.2 U2.40 | length 182.3
  Top Layer w12: U2.40@2055.47,3170.16 2150.39,3170.16 2189.98,3130.57 2193.91,3130.57 2210.55,3113.94 R22.2@2210.55,3110
NetR23_1: R23.1 U4.4 | length 1108.3
  Top Layer w10: U4.4@2951.74,3471.92 2951.74,3471.81 3028,3395.56 v1(3028,3387)
  Top Layer w20: R23.1@2279.45,3190 2281.95,3187.5 2337.5,3187.5 v1(2340,3185)
  Bottom Layer w12: v1(2340,3185) 2380,3185 2430,3135 2515,3135 2690,3310 2690,3405 2745,3460 2955,3460 v1(3028,3387)
NetR23_2: R23.2 U2.41 | length 155.1
  Top Layer w12: U2.41@2055.47,3189.84 2210.39,3189.84 R23.2@2210.55,3190
NetR24_1: R24.1 U4.3 | length 1282.3
  Top Layer w10: U4.3@2965.66,3485.84 3021.5,3430 3035,3430 3079.52,3385.48 3079.52,3360.48 v1(3080,3360)
  Top Layer w20: R24.1@2279.45,3270 v1(2340,3270)
  Bottom Layer w12: v1(2340,3270) 2455,3155 2500,3155 2665,3320 2665,3415.87 2732.44,3483.31 2973.41,3483.31 3080,3376.72 v1(3080,3360)
NetR24_2: R24.2 U2.43 | length 174.3
  Top Layer w12: U2.43@2055.47,3229.21 2111.3,3229.21 2131.51,3249.43 2193.91,3249.43 2210.55,3266.06 R24.2@2210.55,3270
NetR25_1: R25.1 U4.2 | length 1082.2
  Top Layer w10: U4.2@2979.58,3499.76 3027.32,3452.02 3063.89,3452.02 v1(3100.46,3415.46)
  Top Layer w20: R25.1@2279.45,3350 v1(2340,3350)
  Bottom Layer w12: v1(2340,3350) 2380,3350 2540,3510 3005.91,3510 v1(3100.46,3415.46)
NetR25_2: R25.2 U2.44 | length 199.3
  Top Layer w12: U2.44@2055.47,3248.9 2055.57,3248.99 2105.62,3248.99 2145.84,3289.21 2153.7,3289.21 2210.55,3346.06 R25.2@2210.55,3350
NetR26_1: R26.1 U4.1 | length 1052.8
  Top Layer w10: U4.1@2993.5,3513.68 2998.53,3508.65 2998.65,3508.65 3070,3580 3070,3599.04 3090,3619.04 v1(3090,3625)
  Top Layer w20: R26.1@2279.45,3430 v1(2340,3430)
  Bottom Layer w12: v1(2340,3430) 2410,3430 2605,3625 v1(3090,3625)
NetR26_2: R26.2 U2.45 | length 249.7
  Top Layer w12: U2.45@2055.47,3268.58 2055.57,3268.68 2096.64,3268.68 2145.28,3317.32 2145.28,3360.79 2210.55,3426.06 R26.2@2210.55,3430
NetR27_2: R27.2 U2.61 U3.3 | length 512.5
  Top Layer w12: U2.61@1746.42,3400.47 1746.32,3400.57 1746.32,3461.32 v1(1775,3490)
  Bottom Layer w20: v1(1775,3490) 1775,3485.94 1782.5,3478.44 1782.5,3477.5 1820,3440 U3.3@1820,3280.47 1820.69,3279.78 1820.69,3230.41 1840.55,3210.55 R27.2@1945,3210.55
NetR28_1: R28.1 U4.21 | length 718.8
  Top Layer w10: U4.21@2715.11,3235.29 2715.22,3235.29 v2(2775,3175.51)
  Top Layer w20: R28.1@2279.45,3510 v1(2340,3510)
  Layer 1 w20: v1(2340,3510) 2440.51,3510 v2(2775,3175.51)
NetR33_2: R33.2 U5.7 | length 161.4
  Bottom Layer w20: U5.7@2234.8,2315 2305.32,2315 2330.32,2290 R33.2@2385.87,2290
NetR34_2: R34.2 U5.3 | length 111.1
  Bottom Layer w20: R34.2@1934.76,2365 U5.3@2045.83,2365
pads on no net: *.1 J1.4 J1.6 J1.7 J1.8 J1.9 J1.X J1.Y U2.3 U2.19 U2.22 U2.26 U2.27 U2.28 U2.29 U2.30 U2.32 U2.33 U2.34 U2.36 U2.46 U2.48 U2.52 U2.53 U2.54 U2.55 U2.57 U2.58 U2.59 U2.60 U3.7 U4.15 U4.16 U4.17 U4.18 U4.40 U4.53 U4.54 U4.55 U4.77 U4.82 U4.83 U4.84 U4.85 U4.109 U4.110 U4.124 U4.125 U4.126 U4.127 U4.130 U4.131

## Polygon pours and split planes (outlines as drawn)
GND on Layer 1 "GND_L02_P000" (solid, pour order 0): 995.62,4500 4635,4500 4635,3365 4635,1680 999.15,1680
Net*_4 on Layer 2 "NET*_4_L03_P001" (solid, pour order 1): 995.62,4500 4635,4500 4635,1680 999.15,1680

## Silkscreen, mask and mechanical layers (free items; w line width, h text height)
Top Overlay:
  text "Feeding the addiction / Designed by the hose / 11/22020" at 2350,3575 h60
Bottom Overlay:
  drawing of 7079 lines, arcs and shapes, not listed